# Altium PCB AD9760.PcbDoc
Units mil, origin at the board's own origin, x right, y up, seen from the top; angles counter-clockwise.
Board outline 2755.91 x 2165.35 mil, 2 copper layers (Top Layer, Bottom Layer); 73 components, 55 nets, 228 pads, 162 vias.
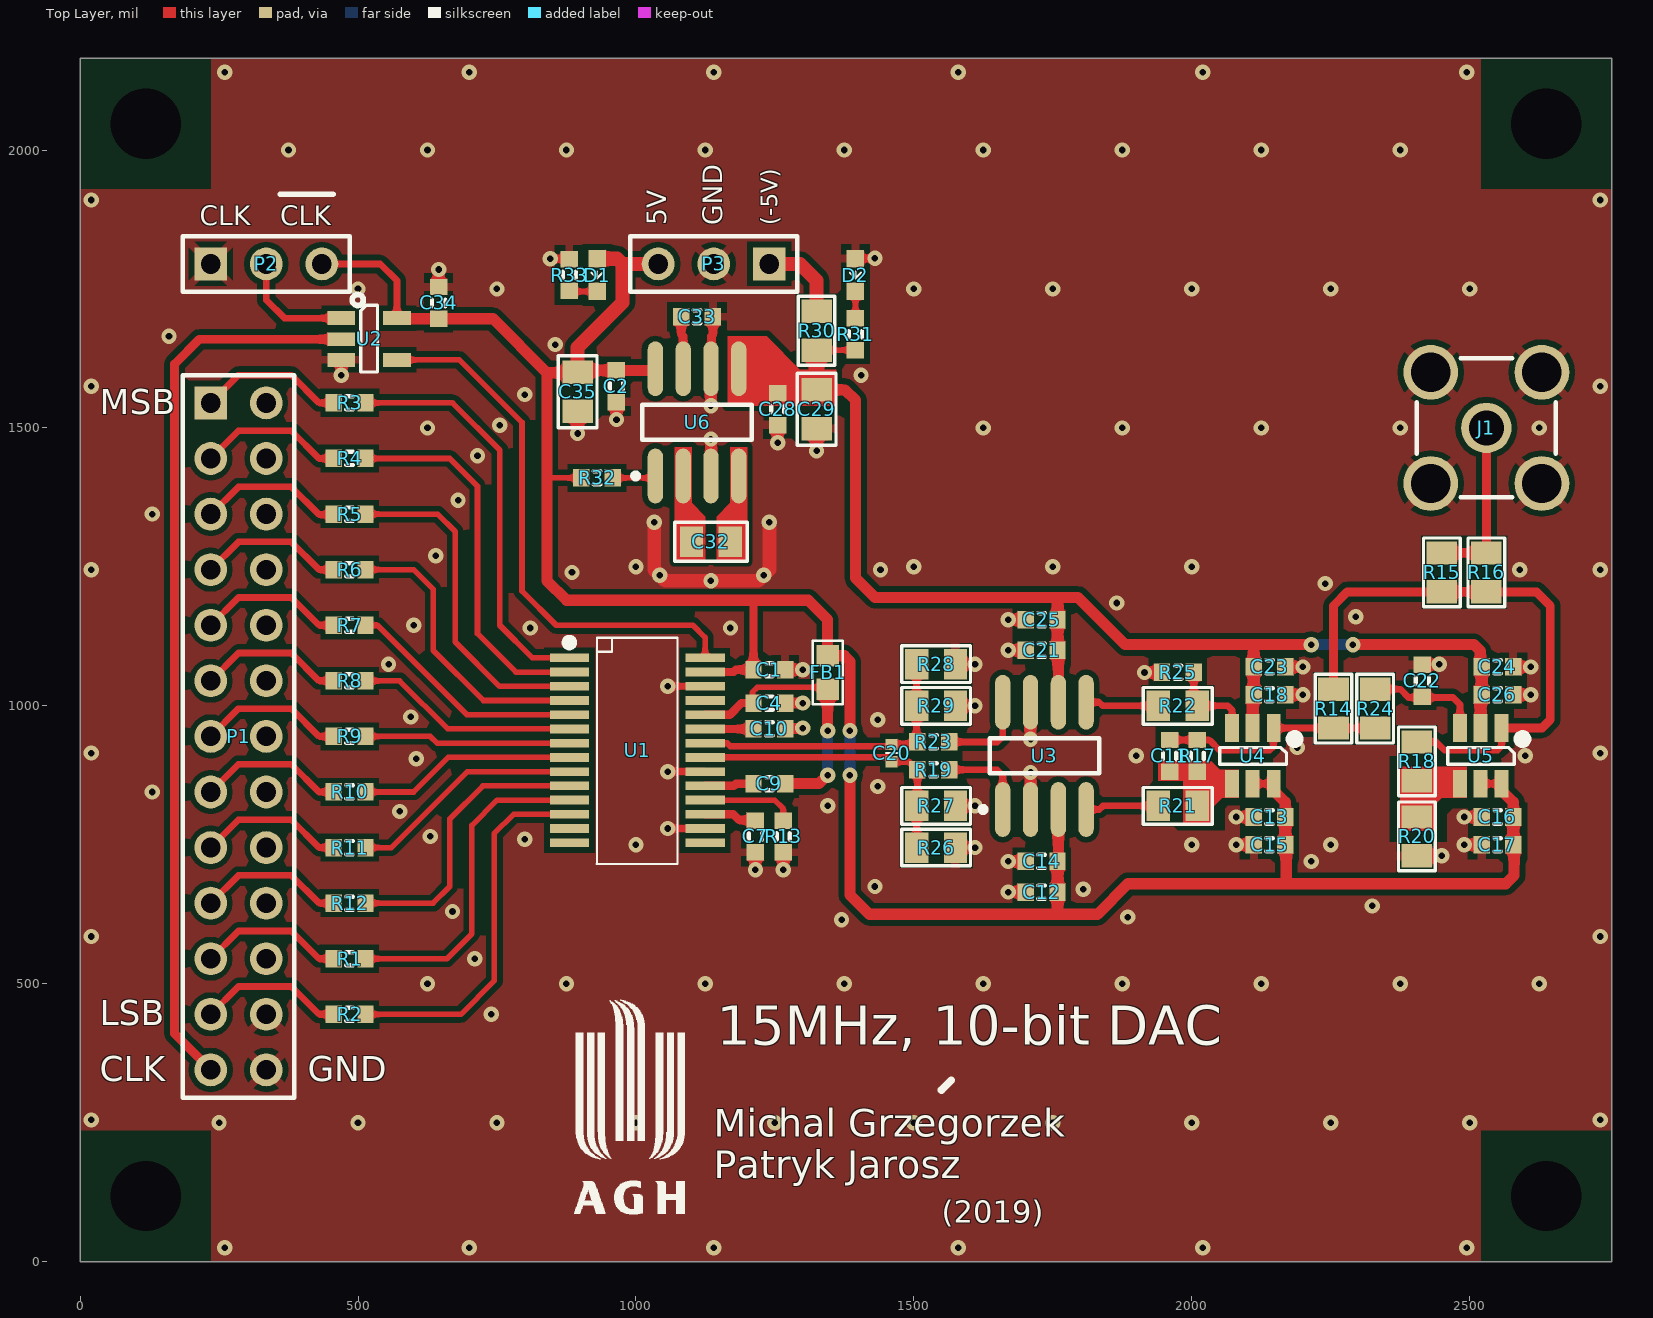
[diagram p0: Top Layer view]
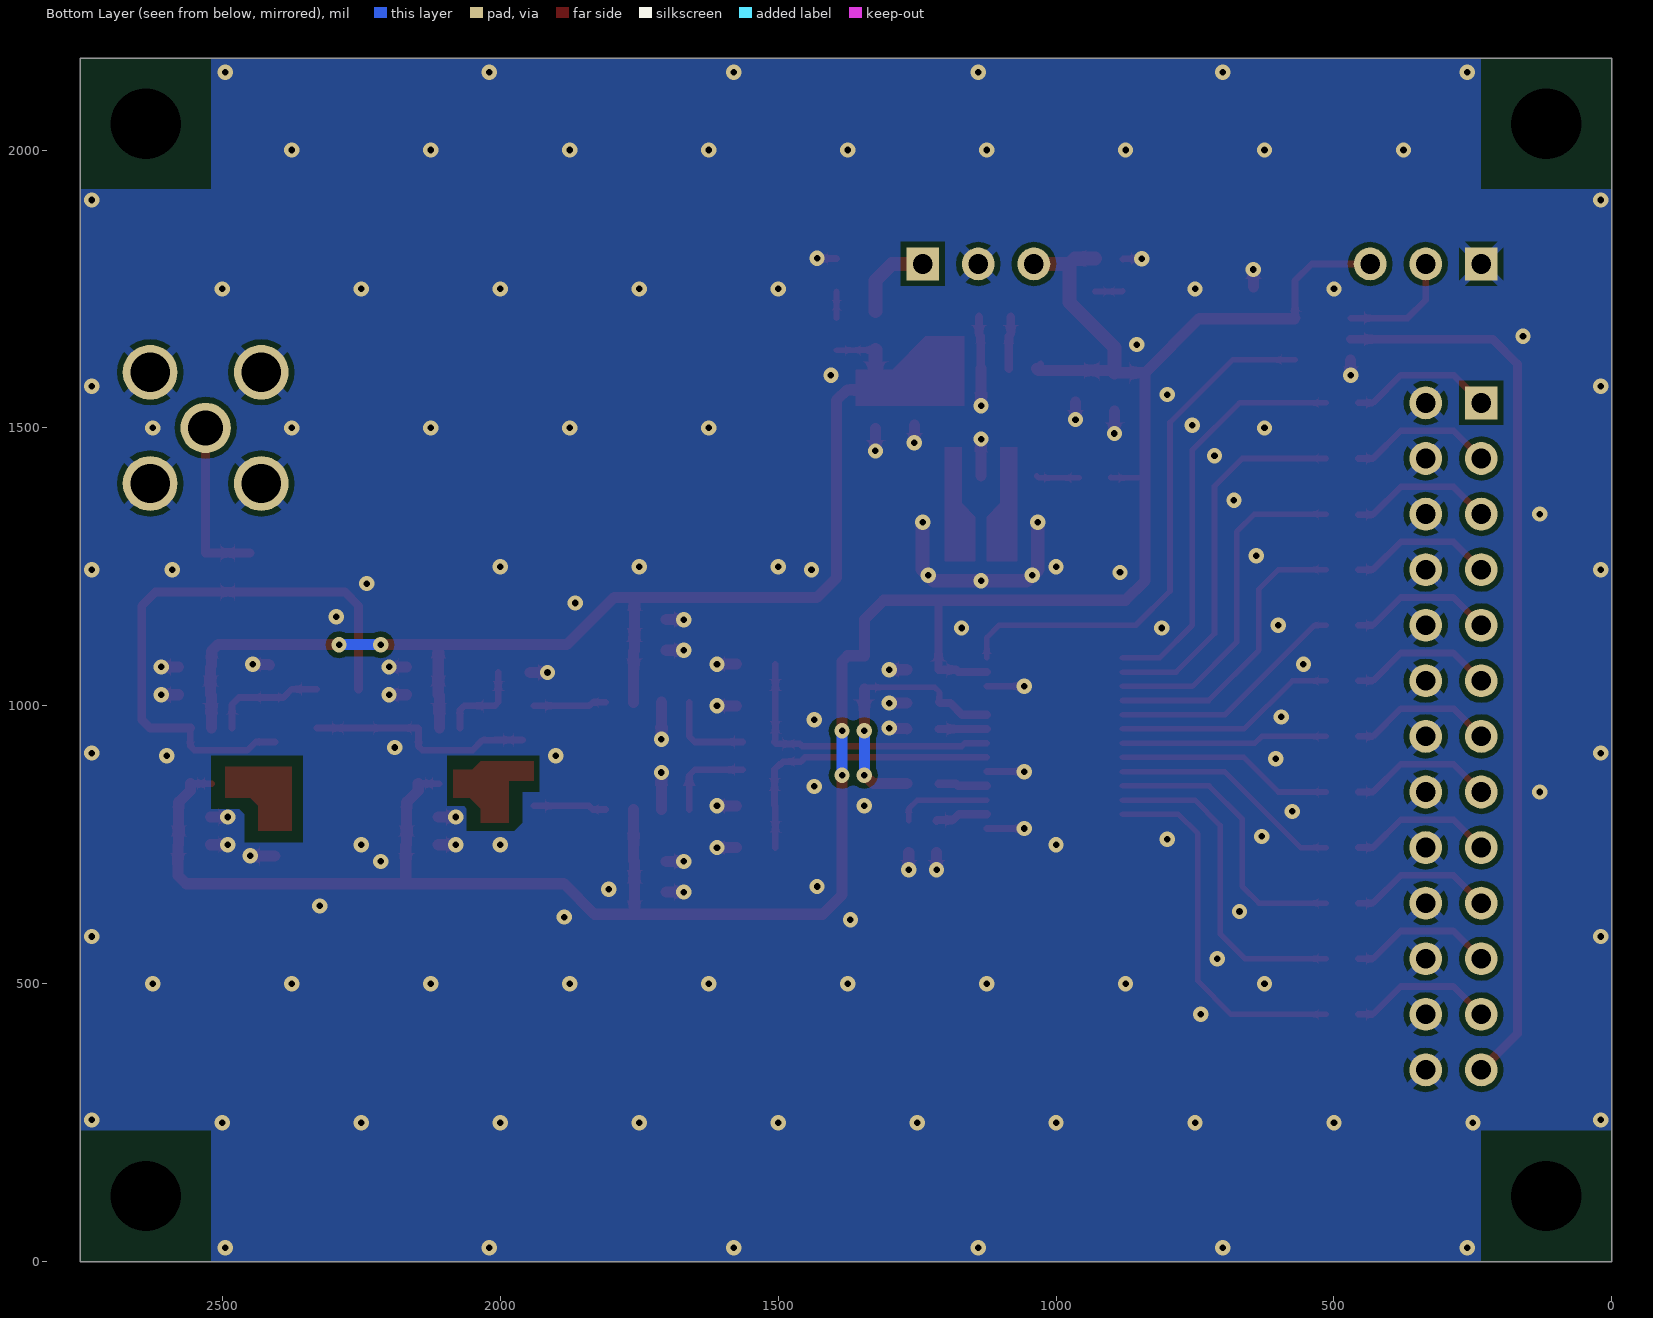
[diagram p1: Bottom Layer view, seen from below]
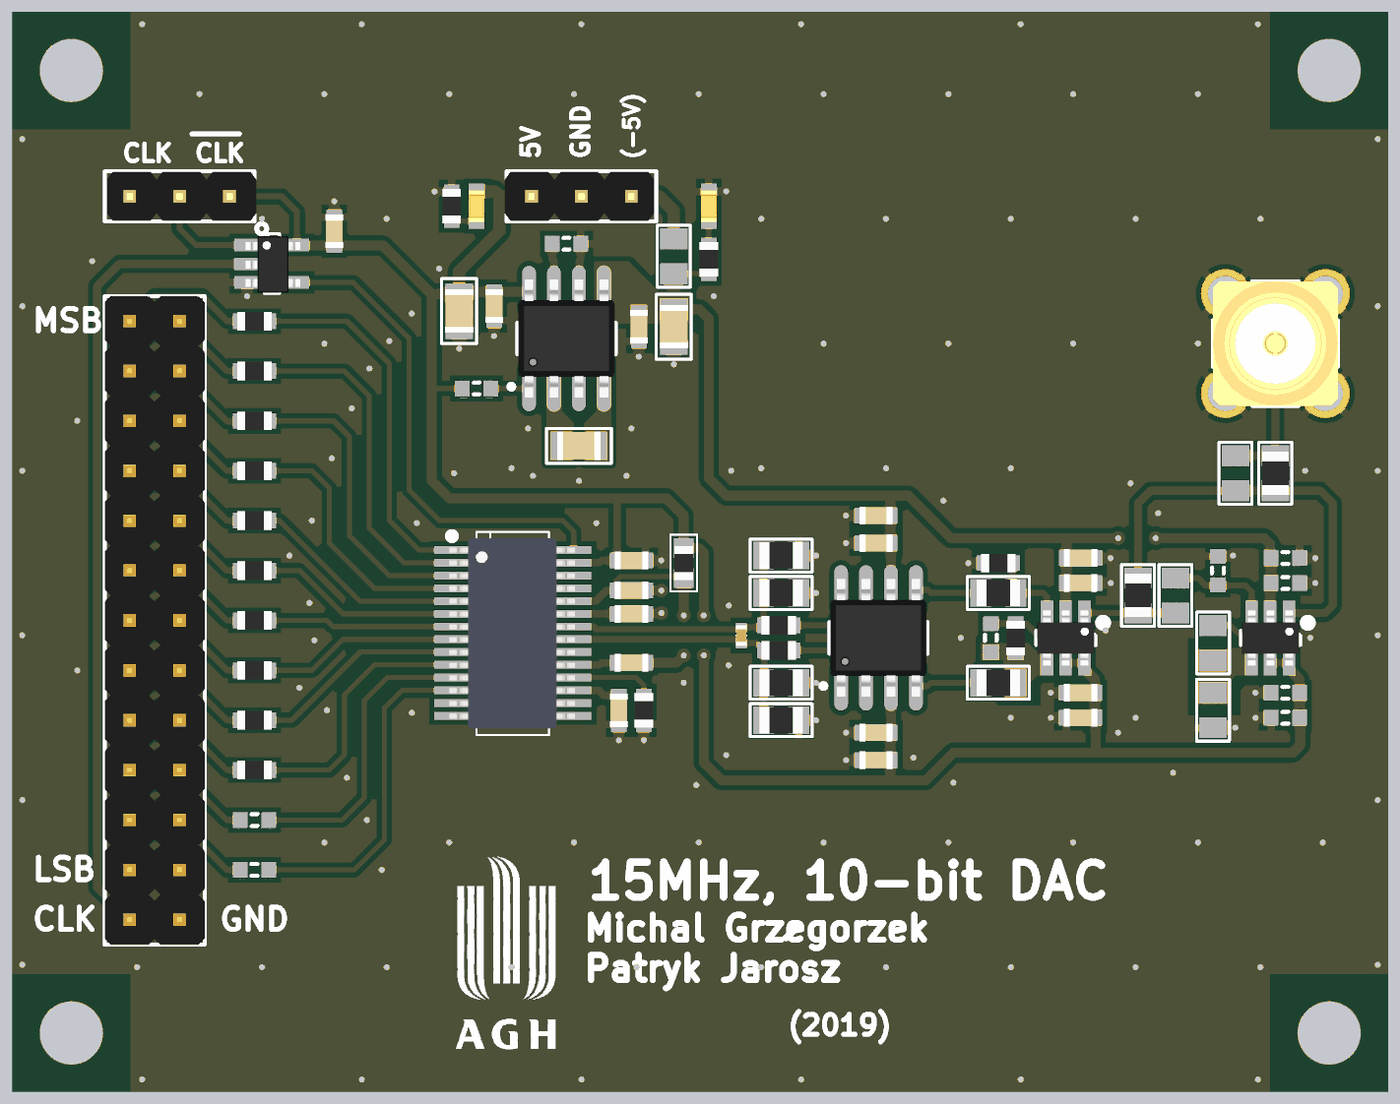
[diagram p2: 3D render of the assembled board from above, using the file's embedded part models]

## Layer stack, top to bottom
Top Solder: solder mask 0.4, Solder Resist, Dk 3.5
Top Layer: signal copper 1.4
Dielectric 1: dielectric 12.6, FR-4, Dk 4.8
Bottom Layer: signal copper 1.4
Bottom Solder: solder mask 0.4, Solder Resist, Dk 3.5

## Board outline
0,0 0,2165.35 2755.91,2165.35 2755.91,0

## Design rules (kind name [scope] priority, off if disabled: settings)
Clearance [All] p1: gap=10 ignorepadtopadclearanceinfootprint=FALSE except(6: Arc-SMDPad Track-SMDPad SMDPad-SMDPad; 8: Arc-Arc Arc-Track Arc-THPad Arc-Via Track-Track Track-THPad Track-Via SMDPad-THPad SMDPad-Via THPad-THPad THPad-Via Via-Via)
DiffPairsRouting [All] p1: maxlimit=10 minlimit=6 mostfreqgap=6 toplayer_minwidth=7 toplayer_maxwidth=15 toplayer_prefwidth=7 bottomlayer_minwidth=7 bottomlayer_maxwidth=15 bottomlayer_prefwidth=7 maxuncoupledlength=500
FabricationTestPointUsage TestPointUsage [All] p1: valid=0 allowmultiple=FALSE
FabricationTestpoint Testpoint [All] p1: side=3 testpointundercomponent=TRUE minsize=40 maxsize=100 preferedsize=60 minholesize=20 maxholesize=40 preferedholesize=32 testpointgrid=1 allowsidetop=TRUE allowsidebottom=TRUE usegrid=TRUE gridtolerance=0.01
Height [All] p1: minheight=0 maxheight=3937.01 prefheight=500
HoleSize [All] p1: absolutevalues=TRUE maxlimit=393.7 minlimit=11.81 maxpercent=80.000 minpercent=20.000
MinimumAnnularRing [All] p1: minimumring=6
MinimumSolderMaskSliver [All] p1: minsoldermaskwidth=6
PlaneConnect [All] p1: planeconnectstyle=Direct reliefexpansion=20 reliefentries=4 reliefconductorwidth=10 reliefairgap=10
PolygonConnect [All] p1: thpad.connectstyle=Relief thpad.reliefconductorwidth=15 thpad.reliefentries=4 thpad.polygonreliefangle="45 Angle" thpad.airgapwidth=10 smdpad.connectstyle=Relief smdpad.reliefconductorwidth=15 smdpad.reliefentries=4 smdpad.polygonreliefangle="90 Angle" smdpad.airgapwidth=10 via.connectstyle=Direct via.reliefconductorwidth=15 via.reliefentries=4 via.polygonreliefangle="45 Angle" via.airgapwidth=10
RoomDefinition U_FrontEnd [InComponentClass('U_FrontEnd')] p1: confinementstyle=ConfineOut formatcopy=TRUE lockcomponents=FALSE outline 4075,515 4650,515 4650,965 4075,965
RoomDefinition U_Power [InComponentClass('U_Power')] p2: confinementstyle=ConfineOut formatcopy=TRUE lockcomponents=FALSE outline 4100,30 4700,30 4700,525 4100,525
RoomDefinition U_DAC [InComponentClass('U_DAC')] p3: confinementstyle=ConfineOut formatcopy=TRUE lockcomponents=FALSE outline 4705,1140 4135,1140 4135,1485 4705,1485
RoutingVias [All] p1: holewidth=15.75 width=27.56 viastyle="Through Hole" minholewidth=11.81 minwidth=23.62 maxholewidth=19.68 maxwidth=39.37
SilkToSilkClearance [All] p1: silktosilkclearance=0
SilkToSolderMaskClearance [IsPad] p1: minsilkscreentomaskgap=2 clearancetoexposedcopper=TRUE
SolderMaskExpansion [All] p1: expansion=1
UnRoutedNet [All] p1: checkbadconnections=TRUE
Width [All] p1: maxlimit=200 minlimit=8 preferedwidth=12 minimp=50.000000 maximp=50.000000 favimp=50.000000
20 further rules are at their usual default settings.

## Classes and differential pairs
component class U_Power: C2 C28 C29 C32 C33 C35 D1 D2 P3 R30 R31 R32 R33 U6
component class U_FrontEnd: C11 C12 C13 C14 C15 C16 C17 C18 C20 C21 C22 C23 C24 C25 C26 J1 R14 R15 R16 R17 R18 R19 R20 R21 R22 R23 R24 R25 R26 R27 R28 R29 U3 U4 U5
component class U_DAC: C1 C4 C7 C9 C10 C34 FB1 P1 P2 R1 R2 R3 R4 R5 R6 R7 R8 R9 R10 R11 R12 R13 U1 U2

## Components (designator, comment, footprint, x,y, rotation, side; value= is the part's Value field where it differs from the comment)
C1 "Ceramic X7R" C_0603_1608 1240,1065 r0 top value=100nF
C2 "Ceramic X7R" C_0603_1608 965,1575 r270 top value=100nF
C4 "Ceramic X7R" C_0603_1608 1240,1005 r0 top value=100nF
C7 "Ceramic X7R" C_0603_1608 1215,765 r270 top value=100nF
C9 "Ceramic X7R" C_0603_1608 1240,860 r0 top value=100nF
C10 "Ceramic X7R" C_0603_1608 1240,958.39 r0 top value=100nF
C11 "-" C_NC_0603_1608 1960,910 r90 top value=NC
C12 "Ceramic X7R" C_0603_1608 1730,665 r180 top value=100nF
C13 "Ceramic X7R" C_0603_1608 2140,800 r180 top value=100nF
C14 "Ceramic X7R" C_0603_1608 1730,720 r180 top value=100nF
C15 "Ceramic X7R" C_0603_1608 2140,750 r180 top value=100nF
C16 "-" C_NC_0603_1608 2550,800 r180 top value=NC
C17 "-" C_NC_0603_1608 2550,750 r180 top value=NC
C18 "Ceramic X7R" C_0603_1608 2140,1020 r0 top value=100nF
C20 "Ceramic C0G" C_0402_1005 1460,915 r90 top value=0.3pF
C21 "Ceramic X7R" C_0603_1608 1730,1100 r180 top value=100nF
C22 "-" C_NC_0603_1608 2415,1045 r90 top value=NC
C23 "Ceramic X7R" C_0603_1608 2140,1070 r0 top value=100nF
C24 "-" C_NC_0603_1608 2550,1070 r0 top value=NC
C25 "Ceramic X7R" C_0603_1608 1730,1155 r180 top value=100nF
C26 "-" C_NC_0603_1608 2550,1020 r0 top value=NC
C28 "Ceramic X7R" C_0603_1608 1255,1533.54 r270 top value=1uF
C29 "Ceramic X7R" C_0805_2012 1325,1533.54 r270 top value=10uF
C32 "Ceramic X7R" C_0805_2012 1135,1295 r0 top value=10uF
C33 "-" C_NC_0603_1608 1110,1700 r0 top value=NC
C34 "Ceramic X7R" C_0603_1608 645,1725 r90 top value=100nF
C35 "Ceramic X7R" C_0805_2012 895,1565 r270 top value=10uF
D1 "Green Led" OL_0603_1608 930,1775 r90 top value=LTST-C190TGKT
D2 "Green Led" OL_0603_1608 1395,1775 r90 top value=LTST-C190TGKT
FB1 "Ferrite bead" FB_0603_1608 1345,1060 r90 top value=BLM18EG221TN1D
J1 "SMA VERTICAL" J_SMA_VERTICAL 2530,1500 r0 top value=901-144-8RFX
P1 "Goldpin" P_HEADER_2x13_2.54 235,1545 r270 top value=DS1021-2*40SF11
P2 "Goldpin" P_HEADER_1x3_2.54 235,1795 r0 top value=DS1021-1*3SF1-1
P3 "Goldpin" P_HEADER_1x3_2.54 1240,1795 r180 top value=DS1021-1*3SF1-1
R1 "Resistor" R_NC_0603_1608 485,545 r0 top value=NC
R2 "Resistor" R_NC_0603_1608 485,445 r0 top value=NC
R3 "Resistor" R_0603_1608 485,1545 r0 top value=22R
R4 "Resistor" R_0603_1608 485,1445 r0 top value=22R
R5 "Resistor" R_0603_1608 485,1345 r0 top value=22R
R6 "Resistor" R_0603_1608 485,1245 r0 top value=22R
R7 "Resistor" R_0603_1608 485,1145 r0 top value=22R
R8 "Resistor" R_0603_1608 485,1045 r0 top value=22R
R9 "Resistor" R_0603_1608 485,945 r0 top value=22R
R10 "Resistor" R_0603_1608 485,845 r0 top value=22R
R11 "Resistor" R_0603_1608 485,745 r0 top value=22R
R12 "Resistor" R_0603_1608 485,645 r0 top value=22R
R13 "Resistor" R_0603_1608 1265,765 r270 top value=2k
R14 "Resistor" R_0805_2012 2255,995 r90 top value=0R
R15 "Resistor" R_NC_0805_2012 2450,1240 r90 top value=NC
R16 "Resistor" R_0805_2012 2530,1240 r90 top value=51R
R17 "Resistor" R_0603_1608 2010,910 r90 top value=1k
R18 "Resistor" R_NC_0805_2012 2405,900 r90 top value=NC
R19 "Resistor" R_0603_1608 1535,885 r0 top value=510R
R20 "Resistor" R_NC_0805_2012 2405,765 r90 top value=NC
R21 "Resistor" R_0805_2012 1975,820 r0 top value=150R
R22 "Resistor" R_0805_2012 1975,1000 r0 top value=150R
R23 "Resistor" R_0603_1608 1535,935 r0 top value=510R
R24 "Resistor" R_NC_0805_2012 2330,995 r90 top value=NC
R25 "Resistor" R_0603_1608 1975,1060 r0 top value=1k
R26 "Resistor" R_0805_2012 1540,745 r180 top value=51R
R27 "Resistor" R_0805_2012 1540,820 r180 top value=51R
R28 "Resistor" R_0805_2012 1540,1075 r180 top value=51R
R29 "Resistor" R_0805_2012 1540,1000 r180 top value=51R
R30 "Resistor" R_NC_0805_2012 1325,1675 r270 top value=NC
R31 "Resistor" R_0603_1608 1395,1668.54 r270 top value=1k
R32 "Resistor" R_NC_0603_1608 930,1410 r180 top value=NC
R33 "Resistor" R_0603_1608 880,1775 r270 top value=1k
U1 "10-Bit, 125MSPS D/A Converter" TSSOP28_EP_4X10X12 1002.5,920 r270 top value=AD9760ARUZ
U2 "2-input EXCLUSIVE-OR gate" SOT23-5_SC74A_SOT753_M 520,1660 r270 top value=74AHC1G86GV,125
U3 "LT6600IS8-15#PBF" SOP8_SO8_SOIC8_4X5X18 1735,910 r90 top
U4 "LTC6228IS6" SOT23-6_SC74A_SOT753 2110,910 r180 top value=LTC6228IS6#TRMPBF
U5 "LTC6228IS6" SOT23-6_SC74A_SOT753 2520,910 r180 top value=LTC6228IS6#TRMPBF
U6 "ADM660" SOP8_SO8_SOIC8_4X5X18 1110,1510 r90 top value=ADM660ARZ

## Footprints (in the part's own frame and the unit in brackets; to place one, negate y for a bottom-side part, rotate by r counter-clockwise, add the part's x,y. Pads: shape width x height; smd on the part's side, far side on the other; paste and mask are expansions set on the pad)
C_0402_1005 [mm]
  rect 0.52x0.56 smd: 1(-0.39,0) 2(0.39,0)
  silkscreen extent 0,-0.25 0,0.25, body extent -0.52,-0.27 0.53,0.28, height 0.55
C_0603_1608 [mm]
  rect 0.75x0.8 smd: 1(-0.725,0) 2(0.725,0)
  silkscreen extent -0.15,-0.3 0.15,0.3, body extent -0.85,-0.45 0.85,0.45, height 0.89
C_0805_2012 [mil]
  rect 42x55 smd: 1(-35,0) 2(35,0)
  silkscreen extent -65,-35 65,35, body extent -43,-29 43,29, height 53
C_NC_0603_1608 [mm]
  rect 0.75x0.8 smd: 1(-0.725,0) 2(0.725,0)
  silkscreen extent -0.15,-0.3 0.15,0.3, body extent -0.85,-0.45 0.85,0.45, height 0.89
FB_0603_1608 [mil]
  rect 39x40 smd: 1(-30,0) 2(30,0)
  silkscreen extent -57,-27 57,27, body extent -34,-19 34,19, height 21
J_SMA_VERTICAL [mm]
  round 2.3 hole 1.6: 1(0,0)
  round 2.5 hole 1.8: 2(-2.54,-2.54) 2(-2.54,2.54) 2(2.54,-2.54) 2(2.54,2.54)
  silkscreen extent -3.17,-3.18 3.18,3.17, body extent -3.17,-3.17 3.18,3.18, height 9.5
OL_0603_1608 [mm]
  rect 0.8x0.8 smd: 1(-0.75,0) 2(0.75,0)
  silkscreen extent -0.15,-0.25 0.15,0.25, body extent -0.8,-0.4 0.8,0.4, height 0.75
P_HEADER_1x3_2.54 [mm] "Connector; Header; 3 Position, Male"
  rect 1.5x1.5 hole 0.9: 1(0,0)
  round 1.5 hole 0.9: 2(2.54,0) 3(5.08,0)
  silkscreen extent -1.27,-1.27 6.35,1.27, body extent -1.17,-1.25 6.45,1.25, height 8.2
P_HEADER_2x13_2.54 [mm] "Connector; Header; 10 Position; Male"
  rect 1.5x1.5 hole 0.9: 1(0,0)
  round 1.5 hole 0.9: 2(0,2.54) 3(2.54,0) 4(2.54,2.54) 5(5.08,0) 6(5.08,2.54) 7(7.62,0) 8(7.62,2.54) 9(10.16,0) 10(10.16,2.54) 11(12.7,0) 12(12.7,2.54) 13(15.24,0) 14(15.24,2.54) 15(17.78,0) 16(17.78,2.54) 17(20.32,0) 18(20.32,2.54) 19(22.86,0) 20(22.86,2.54) 21(25.4,0) 22(25.4,2.54) 23(27.94,0) 24(27.94,2.54) 25(30.48,0) 26(30.48,2.54)
  silkscreen extent -1.27,-1.27 31.75,3.81, body extent -1.27,-1.27 31.75,3.81, height 8.55
R_0603_1608 [mm]
  rect 0.75x0.8 smd: 1(-0.725,0) 2(0.725,0)
  silkscreen extent -0.15,-0.3 0.15,0.3, body extent -0.87,-0.47 0.88,0.48, height 0.54
R_0805_2012 [mil]
  rect 42x55 smd: 1(-35,0) 2(35,0)
  silkscreen extent -62,-33 62,33, body extent -43,-27 43,27, height 27
R_NC_0603_1608 [mm]
  rect 0.75x0.8 smd: 1(-0.725,0) 2(0.725,0)
  silkscreen extent -0.15,-0.3 0.15,0.3, body extent -0.87,-0.47 0.88,0.48, height 0.54
R_NC_0805_2012 [mil]
  rect 42x55 smd: 1(-35,0) 2(35,0)
  silkscreen extent -62,-33 62,33, body extent -43,-27 43,27, height 27
SOP8_SO8_SOIC8_4X5X18 [mm]
  oval 2.5x0.7 smd: 1(-2.45,1.905) 2(-2.45,0.635) 3(-2.45,-0.635) 4(-2.45,-1.905) 5(2.45,-1.905) 6(2.45,-0.635) 7(2.45,0.635) 8(2.45,1.905)
  silkscreen extent -2.57,-2.5 0.8,2.93, body extent -3,-2.45 3,2.45, height 1.7
SOT23-5_SC74A_SOT753_M [mil]
  rect 25x50 smd: 1(-37.5,-50) 2(0.5,-50) 3(37.5,-50) 4(37.5,50) 5(-37.5,50)
  silkscreen extent -80,-30 60,15, body extent -56,-53 59,57, height 57
SOT23-6_SC74A_SOT753 [mil]
  rect 25x50 smd: 1(-37.5,-50) 2(0.5,-50) 3(37.5,-50) 4(37.5,50) 5(0.5,50) 6(-37.5,50)
  silkscreen extent -81,-36 60,15, body extent -57,-55 57,55, height 39
TSSOP28_EP_4X10X12 [mm]
  rect 0.4x1.8 smd: 1(-4.225,-3.1) 2(-3.575,-3.1) 3(-2.925,-3.1) 4(-2.275,-3.1) 5(-1.625,-3.1) 6(-0.975,-3.1) 7(-0.325,-3.1) 8(0.325,-3.1) 9(0.975,-3.1) 10(1.625,-3.1) 11(2.275,-3.1) 12(2.925,-3.1) 13(3.575,-3.1) 14(4.225,-3.1) 15(4.225,3.1) 16(3.575,3.1) 17(2.925,3.1) 18(2.275,3.1) 19(1.625,3.1) 20(0.975,3.1) 21(0.325,3.1) 22(-0.325,3.1) 23(-0.975,3.1) 24(-1.625,3.1) 25(-2.275,3.1) 26(-2.925,3.1) 27(-3.575,3.1) 28(-4.225,3.1)
  silkscreen extent -5.14,-3.2 5.2,1.84, body extent -4.83,-3.23 4.87,3.17, height 1.02

## Part data
C1 C2 C4 C7 C9 C10 C12 C13 C14 C15 C18 C21 C23 C25 C34: library part C_100nF_50V_X7R_0603_5, "Capacitor", Dielectric=X7R, Manufacturer=Samsung, Manufacturer Part Number=CL10B104JB8NNNC, Tolerance (%)=5, Voltage=50V, HelpURL=http://www.tme.eu/pl/Document/4a42202b32dab16128fe107dd69598cc/samsung-chip-cap.pdf, Part Number=C_100nF_50V_X7R_0603_5, SCH_Footprint=0603, Supplier 1=TME, Supplier 2="RS Components", Supplier 3=Farnell, Supplier 4=Mouser, Supplier 5=Digi-Key, Supplier Part Number 1=CL10B104JB8NNNC
C11 C16 C17 C22 C24 C26 C33: library part C_GENERIC_0603, "Capacitor", Tolerance (%)=0, Voltage=0V, Dielectric=-, HelpURL=http://-, Manufacturer=-, Manufacturer Part Number=-, Part Number=C_GENERIC_0603, SCH_Footprint=0603, Supplier 1=TME, Supplier 2="RS Components", Supplier 3=Farnell, Supplier 4=Mouser, Supplier 5=Digi-Key
C20: library part C_0.3pF_50V_C0G_0402_33, "Capacitor", Dielectric=C0G, Manufacturer=Kemet, Manufacturer Part Number=CBR04C308B5GAC, Tolerance (%)=33, Voltage=50V, HelpURL=http://www.farnell.com/datasheets/2202355.pdf, Part Number=C_0.3pF_50V_C0G_0402_33, SCH_Footprint=0402, Supplier 1=TME, Supplier 2="RS Components", Supplier 3=Farnell, Supplier 4=Mouser, Supplier 5=Digi-Key, Supplier Part Number 2=7697024, Supplier Part Number 3=1973007, Supplier Part Number 4=80-CBR04C308B5G, Supplier Part Number 5=399-6155-1-ND
C28: library part C_1uF_25V_X7R_0603_10, "Capacitor", Dielectric=X7R, Manufacturer=Samsung, Manufacturer Part Number=CL10B105KA8NNNC, Tolerance (%)=10, Voltage=25V, HelpURL=http://www.tme.eu/pl/Document/4a42202b32dab16128fe107dd69598cc/samsung-chip-cap.pdf, Part Number=C_1uF_25V_X7R_0603_10, SCH_Footprint=0603, Supplier 1=TME, Supplier 2="RS Components", Supplier 3=Farnell, Supplier 4=Mouser, Supplier 5=Digi-Key, Supplier Part Number 1=CL10B105KA8NNNC
C29 C32 C35: library part C_10uF_10V_X7R_0805_10, "Capacitor", Dielectric=X7R, Manufacturer="Samsung Electro-Mechanics", Manufacturer Part Number=CL21B106KPQNNNG, Tolerance (%)=10, Voltage=10V, HelpURL=http://www.tme.eu/pl/Document/4a42202b32dab16128fe107dd69598cc/samsung-chip-cap.pdf, Part Number=C_10uF_10V_X7R_0805_10, SCH_Footprint=0805, Supplier 1=TME, Supplier 2="RS Components", Supplier 3=Farnell, Supplier 4=Mouser, Supplier 5=Digi-Key, Supplier Part Number 1=CL21B106KPQNNNG
D1 D2: library part OL_G_0603, "LED GREEN", Manufacturer=Lite-On, Manufacturer Part Number=LTST-C190TGKT, HelpURL=https://datasheet.octopart.com/LTST-C190TGKT-Lite-On-datasheet-158437.pdf, Part Number=OL_G_0603, SCH_Footprint=0603, Supplier 1=TME, Supplier 2="RS Components", Supplier 3=Farnell, Supplier 4=Mouser, Supplier 5=Digi-Key, Supplier Part Number 1=LTST-C190TGKT, Supplier Part Number 2=6920997P, Supplier Part Number 4=859-LTST-C190TGKT, Supplier Part Number 5=160-2019-1-ND
FB1: library part FB_BLM18EG221TN1D, "Ferrite Bead", Current=1A, Manufacturer=Murata, Manufacturer Part Number=BLM18EG221TN1D, Resistance=150mR, HelpURL=http://datasheet.octopart.com/BLM18EG221TN1D-Murata-datasheet-66919.pdf, Part Number=FB_BLM18EG221TN1D, SCH_Footprint=0603, Supplier 1=TME, Supplier 2="RS Components", Supplier 3=Farnell, Supplier 4=Mouser, Supplier 5=Digi-Key, Supplier Part Number 2=7926243P, Supplier Part Number 3=1515717, Supplier Part Number 4=81-BLM18EG221TN1D, Supplier Part Number 5=490-5979-1-ND
J1: library part J_SMA_VERTICAL, "SMA connector", Manufacturer="Amphenol RF", Manufacturer Part Number=901-144-8RFX, Component Type=Standard, HelpURL=http://www.mouser.com/ds/2/18/C901-144-8RFX-710432.pdf, Part Number=J_SMA_VERTICAL, SCH_Footprint="SMA VERTICAL", Supplier 1=TME, Supplier 2="RS Components", Supplier 3=Farnell, Supplier 4=Mouser, Supplier 5=Digi-Key, Supplier Part Number 3=1339820, Supplier Part Number 4=523-901-144-8RFX, Supplier Part Number 5=ARFX1231-ND
P1: library part P_HEADER_2x13_2.54, "Header, 26-Pin, Dual row", Manufacturer=Connfly, Manufacturer Part Number=DS1021-2*40SF11, Supplier Part Number 1=ZL202-80G, Component Type=Standard, HelpURL=http://www.tme.eu/pl/details/zl202-80g/listwy-i-gniazda-kolkowe/connfly/ds1021-2_40sf11/, Part Number=P_HEADER_2x13_2.54, SCH_Footprint="2x13 2.54mm", Supplier 1=TME, Supplier 2="RS Components", Supplier 3=Farnell, Supplier 4=Mouser, Supplier 5=Digi-Key
P2 P3: library part P_HEADER_1x3_2.54, "Header, 3-Pin", Manufacturer=Connfly, Manufacturer Part Number=DS1021-1*3SF1-1, Supplier Part Number 1=ZL201-03G, Component Type=Standard, HelpURL=http://www.tme.eu/en/Document/cc301e58a5da78cb543a94b5a5b7f06a/DS1021.pdf, Part Number=P_HEADER_1x3_2.54, SCH_Footprint="1x3 2.54mm", Supplier 1=TME, Supplier 2="RS Components", Supplier 3=Farnell, Supplier 4=Mouser, Supplier 5=Digi-Key
R1 R2 R32: library part R_GENERIC_0603, Part Number=R_GENERIC_0603, SCH_Footprint=0603, Supplier 1=TME, Supplier 2="RS Components", Supplier 3=Farnell, Supplier 4=Mouser, Supplier 5=Digi-Key
R3 R4 R5 R6 R7 R8 R9 R10 R11 R12: library part R_22R_0603_5, Manufacturer=Walsin, Manufacturer Part Number=WF06P220JTL, Power=125mW, Supplier Part Number 1=WF06P-22R-5%, Tolerance=5%, Voltage=50V, HelpURL=http://www.tme.eu/pl/Document/b315665a56acbc42df513c99b390ad98/ROYALOHM-THICKFILM.pdf, Part Number=R_22R_0603_5, SCH_Footprint=0603, Supplier 1=TME, Supplier 2="RS Components", Supplier 3=Farnell, Supplier 4=Mouser, Supplier 5=Digi-Key
R13: library part R_2k_0603_1, Manufacturer=Yageo, Manufacturer Part Number=RC0603FR-072KL, Power=100mW, Supplier Part Number 1=RC0603FR-072K, Tolerance=1%, Voltage=50V, HelpURL=http://datasheet.octopart.com/RC0603FR-072KL-Yageo-datasheet-8328172.pdf, Part Number=R_2k_0603_1, SCH_Footprint=0603, Supplier 1=TME, Supplier 2="RS Components", Supplier 3=Farnell, Supplier 4=Mouser, Supplier 5=Digi-Key, Supplier Part Number 4=603-RC0603FR-072KL, Supplier Part Number 5=311-2.00KHRCT-ND
R14: library part R_0R_0805_5, Manufacturer="Stackpole Electronics Inc.", Manufacturer Part Number=RMCF0805ZT0R00, Power=125mW, Tolerance=5%, Voltage=150V, HelpURL=https://www.seielect.com/Catalog/SEI-RMCF_RMCP.pdf, Part Number=R_0R_0805_5, SCH_Footprint=0805, Supplier 1=TME, Supplier 2="RS Components", Supplier 3=Farnell, Supplier 4=Mouser, Supplier 5=Digi-Key, Supplier Part Number 5=RMCF0805ZT0R00CT-ND
R15 R18 R20 R24 R30: library part R_GENERIC_0805, Part Number=R_GENERIC_0805, SCH_Footprint=0805, Supplier 1=TME, Supplier 2="RS Components", Supplier 3=Farnell, Supplier 4=Mouser, Supplier 5=Digi-Key
R16 R26 R27 R28 R29: library part R_51R_0805_1, Manufacturer=Royalohm, Manufacturer Part Number=0805S8F510JT5E, Power=125mW, Supplier Part Number 1=SMD0805-51R-1%, Tolerance=1%, Voltage=150V, HelpURL=https://www.tme.eu/pl/Document/b315665a56acbc42df513c99b390ad98/ROYALOHM-THICKFILM.pdf, Part Number=R_51R_0805_1, SCH_Footprint=0805, Supplier 1=TME, Supplier 2="RS Components", Supplier 3=Farnell, Supplier 4=Mouser, Supplier 5=Digi-Key
R17 R25 R31 R33: library part R_1k_0603_1, Manufacturer=Vishay, Manufacturer Part Number=CRCW06031K00FKEA, Power=100mW, Tolerance=1%, Voltage=75V, HelpURL=http://www.farnell.com/datasheets/2310790.pdf?_ga=2.256888843.1690599162.1548417389-1379097396.1542296996&_gac=1.262631934.1547230258.Cj0KCQiAmuHhBRD0ARIsAFWyPwhX8HcvXnM3tA0ZBodZLzDIjH2ZxLpjT5LWo9bad_HPRbU8LfPq44UaAhEwEALw_wcB, Part Number=R_1k_0603_1, SCH_Footprint=0603, Supplier 1=TME, Supplier 2="RS Components", Supplier 3=Farnell, Supplier 4=Mouser, Supplier 5=Digi-Key, Supplier Part Number 2=678-9875P, Supplier Part Number 3=1469740, Supplier Part Number 4=71-CRCW0603-1.0K-E3, Supplier Part Number 5=541-1.00KHCT-ND
R19 R23: library part R_510R_0603_1, Manufacturer=Vishay, Manufacturer Part Number=CRCW0603510RFKTABC, Power=100mW, Tolerance=1%, Voltage=75V, HelpURL=https://www.tme.eu/pl/Document/622e28308c06d160637f2b14751ba16b/Data%20Sheet%20CRCW_BCe3.pdf, Part Number=R_510R_0603_1, SCH_Footprint=0603, Supplier 1=TME, Supplier 2="RS Components", Supplier 3=Farnell, Supplier 4=Mouser, Supplier 5=Digi-Key, Supplier Part Number 1=CRCW0603510RFKTABC, Supplier Part Number 4=71-CRCW0603-510
R21 R22: library part R_150R_0805_1, Manufacturer=Royalohm, Manufacturer Part Number=0805S8F1503T5E, Power=125mW, Supplier Part Number 1=SMD0805-150K-1%, Tolerance=1%, Voltage=150V, HelpURL=https://www.tme.eu/pl/Document/b315665a56acbc42df513c99b390ad98/ROYALOHM-THICKFILM.pdf, Part Number=R_150R_0805_1, SCH_Footprint=0805, Supplier 1=TME, Supplier 2="RS Components", Supplier 3=Farnell, Supplier 4=Mouser, Supplier 5=Digi-Key
U1: library part U_AD9760ARUZ, "10-Bit 125Msps DACs", Manufacturer="Analog Devices", Manufacturer Part Number=AD9760ARUZ, HelpURL=https://www.analog.com/media/en/technical-documentation/data-sheets/AD9760.pdf, Part Number=U_AD9760ARUZ, SCH_Footprint=TSSOP28, Supplier 1=TME, Supplier 2="RS Components", Supplier 3=Farnell, Supplier 4=Mouser, Supplier 5=Digi-Key, Supplier Part Number 3=2192248, Supplier Part Number 4=584-AD9760ARUZ, Supplier Part Number 5=AD9760ARUZ-ND
U2: library part U_74AHC1G86GV.125, Manufacturer=Nexperia, Manufacturer Part Number=74AHC1G86GV,125, Supplier Part Number 1=74AHC1G86GV.125, HelpURL=https://assets.nexperia.cn/documents/data-sheet/74AHC_AHCT1G86_Q100.pdf, Part Number=U_74AHC1G86GV.125, SCH_Footprint=SOT23-5, Supplier 1=TME, Supplier 2="RS Components", Supplier 3=Farnell, Supplier 4=Mouser, Supplier 5=Digi-Key, Supplier Part Number 2=146-0517, Supplier Part Number 3=2777697, Supplier Part Number 4=771-AHC1G86GV125, Supplier Part Number 5=1727-4201-2-ND
U3: library part U_LT6600IS8-15#PBF, Manufacturer="Analog Devices", HelpURL=https://www.analog.com/media/en/technical-documentation/data-sheets/660015fb.pdf, Manufacturer Part Number=LT6600IS8-15#PBF, Part Number=U_LT6600IS8-15#PBF, SCH_Footprint=SOIC8, Supplier 1=TME, Supplier 2="RS Components", Supplier 3=Farnell, Supplier 4=Mouser, Supplier 5=Digi-Key, Supplier Part Number 4=584-LT6600IS8-15#PBF, Supplier Part Number 5=LT6600IS8-15#PBF-ND
U4 U5: library part U_LTC6228IS6#TRPBF, Manufacturer="Analog Devices", Manufacturer Part Number=LTC6228IS6#TRMPBF, HelpURL=https://www.analog.com/media/en/technical-documentation/data-sheets/LTC6228-6229.pdf, Part Number=U_LTC6228IS6#TRPBF, SCH_Footprint=SOT23-6, Supplier 1=TME, Supplier 2="RS Components", Supplier 3=Farnell, Supplier 4=Mouser, Supplier 5=Digi-Key, Supplier Part Number 4=584-6228IS6#TRMPBF, Supplier Part Number 5=LTC6228IS6#TRMPBFCT-ND
U6: library part VS_ADM660ARZ, Frequency (kHz)=25, Manufacturer="Analog Devices", Manufacturer Part Number=ADM660ARZ, HelpURL=https://www.analog.com/media/en/technical-documentation/data-sheets/ADM660_8660.pdf, Imax (A)=0,1, Iswitch (A)=0, Part Number=VS_ADM660ARZ, SCH_Footprint=SOIC8, Supplier 1=TME, Supplier 2="RS Components", Supplier 3=Farnell, Supplier 4=Mouser, Supplier 5=Digi-Key, Supplier Part Number 3=1661070, Supplier Part Number 4=584-ADM660ARZ, Supplier Part Number 5=ADM660ARZ-ND, Topology=Other, Vin max (V)=7, Vin min (V)=1,5, Vout max (V)=-1,5, Vout min (V)=-7

## Free pads (board coordinates)
  round 60 hole 125.98: 0(118.11,118.11) 0(118.11,2047.24) 0(2637.8,118.11) 0(2637.8,2047.24)

## Via types
v1: diameter 27.56, hole 11.81, Top Layer to Bottom Layer, tented both sides, 162 vias

## Nets (pads, with @x,y where several pads share a name; then routed paths per layer and width w, separated by ;. In a path a pad name is that pad's centre, name@x,y a point inside that pad or via, vN(x,y) a via of type N, cw(c..) or ccw(c..) an arc to the next point about the centre after c; other vN are vias at no path point)
5V: C1.1 C2.1 C12.1 C13.1 C14.1 C15.1 C16.1 C17.1 C34.1 C35.1 D1.2 FB1.2 P2.3 P3.3 R32.2 U1.27 U2.5 U3.3 U4.5 U4.6 U5.5 U5.6 U6.8 | length 4656
  Top Layer w10: 840,1405 845,1410 R32.2 R32.2@901.46,1410.98
  Top Layer w12: P2.3 540,1795 570,1765 U2.5 ; U6.8@1027.81,1615 1035,1607.81 U6.8 ; U4.5 U4.6 ; U5.5 U5.6
  Top Layer w15: U1.27 1175.75,1060.75 1180,1065 C1.1 1211.46,1188.54 1210,1190
  Top Layer w20: U2.5 571.04,1696.46 C34.1 742.76,1696.46 840,1599.22 ; U6.8 1032.09,1603.54 C2.1 898.54,1603.54 C35.1 894.22,1599.22 840,1599.22 ; v1(1385,875) 1385,660 1420,625 1758.54,625 ; v1(1385,955) 1385,1080 1375,1090 FB1.2 1344.5,1090.5 1344.5,1155.5 1310,1190 1210,1190 875,1190 840,1225 840,1405 840,1599.22 ; U3.3 1760,721.46 C14.1 C12.1 1758.54,625 ; U4.6 2147.5,847.5 2168.54,826.46 C13.1 C15.1 2170,748.54 2170,680 ; U5.6 2557.5,847.5 2578.54,826.46 C16.1 C17.1 2580,748.54 2580,695 2565,680 2170,680 ; 1758.54,625 1830,625 1885,680 2170,680
  Top Layer w25: C35.1 895,1645 975.75,1725.75 975.75,1795 ; D1.2 966.22,1804.53 975.75,1795 ; P3.3@1035,1795 975.75,1795
  Bottom Layer w20: v1(1385,875) v1(1385,955)
5VA: C4.1 C9.2 FB1.1 U1.24 | length 490.7
  Top Layer w10: C4.1@1210,1006.46 1210,1025 1218.25,1033.25 1341.75,1033.25 FB1.1
  Top Layer w15: U1.24 1168.98,983.98 1190,1005 1208.54,1005 C4.1@1210,1006.46
  Top Layer w20: C9.2 1329.5,860 1344.5,875 v1(1345,875) ; v1(1345,955) FB1.1
  Bottom Layer w20: v1(1345,875) v1(1345,955)
-5V: C18.1 C21.1 C23.1 C24.1 C25.1 C26.1 C28.1 C29.1 R30.2 R31.2 U3.6 U4.2 U5.2 U6.5 | length 2198.5
  Top Layer w10: R30.2 R31.2
  Top Layer w20: C29.1 1376.46,1568.54 1395,1550 1395,1230 1430,1195 1760,1195 ; U3.6 1760,1098.54 C21.1 C25.1 1758.54,1193.54 1760,1195 ; U4.2 2109.5,1018.04 C18.1 C23.1 2111.46,1110 ; v1(2215,1110) 2111.46,1110 ; v1(2290,1110) 2507.54,1110 2519.26,1098.28 2519.26,1072.2 C24.1 C26.1 2519.5,1018.04 U5.2 ; 1760,1195 1795,1195 1880,1110 2111.46,1110
  Top Layer w25: C29.1 R30.2
  Bottom Layer w20: v1(2215,1110) v1(2290,1110)
C\L\K\: U1.28 U2.4 | length 975.8
  Top Layer w10: U2.4 682.5,1622.5 795,1510 795,1206.63 856.63,1145 1102.5,1145 1124.55,1122.95 U1.28
CLK: P1.25 U2.2 | length 1615.4
  Top Layer w16: P1.25 170,410 170,1615 214.5,1659.5 U2.2
D0: P1.23 R2.1 | length 262.9
  Top Layer w12: P1.23 285,495 380,495 430,445 R2.1
D1: P1.21 R1.1 | length 262.9
  Top Layer w12: P1.21 285,595 380,595 430,545 R1.1
D2: P1.19 R12.1 | length 262.9
  Top Layer w12: P1.19 285,695 380,695 430,645 R12.1
D3: P1.17 R11.1 | length 262.9
  Top Layer w12: P1.17 285,795 380,795 430,745 R11.1
D4: P1.15 R10.1 | length 262.9
  Top Layer w12: P1.15 285,895 380,895 430,845 R10.1
D5: P1.13 R9.1 | length 262.9
  Top Layer w12: P1.13 285,995 380,995 430,945 R9.1
D6: P1.11 R8.1 | length 262.9
  Top Layer w12: P1.11 285,1095 380,1095 430,1045 R8.1
D7: P1.9 R7.1 | length 262.9
  Top Layer w12: P1.9 285,1195 380,1195 430,1145 R7.1
D8: P1.7 R6.1 | length 262.9
  Top Layer w12: P1.7 285,1295 380,1295 430,1245 R6.1
D9: P1.5 R5.1 | length 262.9
  Top Layer w12: P1.5@235,1343.98 285,1393.98 380,1393.98 430,1343.98 R5.1@456.46,1343.98
D10: P1.3 R4.1 | length 262.9
  Top Layer w12: P1.3 285,1495 380,1495 430,1445 R4.1
D11: P1.1 R3.1 | length 262.9
  Top Layer w12: P1.1 285,1595 380,1595 430,1545 R3.1
GND: C1.2 C2.2 C4.2 C7.2 C10.2 C12.2 C13.2 C14.2 C15.2 C16.2 C17.2 C18.2 C21.2 C22.2 C23.2 C24.2 C25.2 C26.2 C28.2 C29.2 C33.2 C34.2 C35.2 D2.2 J1.2 P1.2 P1.4 P1.6 P1.8 P1.10 P1.12 P1.14 P1.16 P1.18 P1.20 P1.22 P1.24 P1.26 P2.1 P3.2 R13.2 R20.1 R25.1 R26.1 R27.1 R28.1 R29.1 R33.1 U1.16 U1.20 U1.26 U2.3 U3.2 U3.7 U6.3 U6.6 | length 2011
  Top Layer w12: v1@845,1805 v1(845.73,1804.27) 879.27,1804.27 R33.1 ; v1(1057.5,779.25) 1057.66,779.41 U1.16@1124.55,779.41 ; v1(1057.5,881.61) 1057.66,881.77 U1.20@1124.55,881.77 ; v1(1057.5,1035) 1057.66,1035.16 U1.26 ; D2.2 1395.24,1804.76 1429.76,1804.76 v1(1430,1805)
  Top Layer w15: U6.6 1135.69,1607.14 1135.69,1665 1138.54,1667.86 C33.2
  Top Layer w20: v1(470,1595) U2.3 ; C34.2 v1(645,1785) ; v1(895,1490) C35.2 ; v1(965,1515) C2.2 ; U6.3 v1(1135,1480) ; v1(1135,1540) U6.6 ; v1(1215,705) C7.2 ; v1(1255,1473.54) C28.2 ; v1(1265,705) R13.2 ; C10.2 1269.35,959.19 1299.19,959.19 v1(1300,960) ; C4.2 v1(1300,1005) ; C1.2 v1(1300,1065) ; v1(1325,1458.54) C29.2 ; R26.1 v1(1610,745) ; R27.1 v1(1610,820) ; R29.1 v1(1610,1000) ; R28.1 v1(1610,1075) ; v1(1670,665) C12.2 ; v1(1670,720) C14.2 ; v1(1670,1100) C21.2 ; v1(1670,1155) C25.2 ; U3.2 v1(1710,880) ; v1(1710,940) U3.7 ; v1(1915,1060) R25.1 ; v1(2080,750) C15.2 ; v1(2080,800) C13.2 ; C18.2 v1(2200,1020) ; C23.2 v1(2200,1070) ; R20.1 v1(2450,730) ; C22.2 2415.73,1074.27 2444.27,1074.27 v1(2445,1075) ; v1(2490,750) C17.2 ; v1(2490,800) C16.2 ; C26.2 v1(2610,1020) ; C24.2 v1(2610,1070)
  Top Layer w25: v1(1032.91,1330) 1032.91,1245 v1(1042.91,1235) 1052.91,1225 v1(1135,1225) 1220,1225 v1(1230,1235) 1240,1245 v1(1240,1330)
  other v1: 260,25 700,25 1140,25 1580,25 2020,25 2495,25 250,250 500,250 750,250 1000,250 1250,250 1500,250 1750,250 2000,250 2250,250 2500,250 20,255 2735,255 740,445 625,500 875,500 1125,500 1375,500 1625,500 1875,500 2125,500 2375,500 2625,500 710,545 20,585 2735,585 1370,615 1885,620 670,630 2325,640 1805,670 1430,675 2215,720 1000,750 2000,750 2250,750 800,760 630,765 575,810 1345,820 130,845 1435,855 605,905 1900,910 2600,910 20,915 2735,915 2190,925 1435,975 595,980 555,1075 810,1140 1170,1140 600,1145 2295,1160 1865,1185 2240,1220 885,1240 20,1245 1440,1245 2590,1245 2735,1245 1000,1250 1500,1250 1750,1250 2000,1250 640,1270 130,1345 680,1370 715,1450 625,1500 1625,1500 1875,1500 2125,1500 2375,1500 2625,1500 755,1505 800,1560 20,1575 2735,1575 1405,1595 855,1650 160,1665 500,1750 750,1750 1500,1750 1750,1750 2000,1750 2250,1750 2500,1750 20,1910 2735,1910 375,2000 625,2000 875,2000 1125,2000 1375,2000 1625,2000 1875,2000 2125,2000 2375,2000 260,2140 700,2140 1140,2140 1580,2140 2020,2140 2495,2140
NetC7_1: C7.1 U1.17 | length 95.1
  Top Layer w15: U1.17 1175.16,804.84 1185.54,794.46 1214.08,794.46 C7.1
NetC9_1: C9.1 U1.19 | length 88.6
  Top Layer w15: U1.19 1176.02,856.02 1180,860 C9.1
NetC10_1: C10.1 U1.23 | length 86.9
  Top Layer w15: U1.23 C10.1
NetC11_1: C11.1 R17.1 R21.2 U4.4
NetC11_2: C11.2 R14.1 R17.2 R24.1 U4.1 | length 438.3
  Top Layer w12: C11.2 R17.2 2010.26,938.28 2031.72,938.28 2050,920 2140,920 2147.03,927.03 2147.03,959.53 U4.1 R14.1@2280,960 ; R14.1 R24.1
NetC20_1: C20.1 R19.1 R26.2 R27.2 U1.21 | length 532.3
  Top Layer w12: U1.21 1451.65,907.2 1459.21,899.65 C20.1 1490.66,899.65 1495.56,894.75 1497.69,894.75 1506.46,885.98 R19.1 1506.46,821.46 R27.2 R26.2
NetC20_2: C20.2 R23.1 R28.2 R29.2 U1.22 | length 528
  Top Layer w12: U1.22 1164.43,932.8 1170,927.22 1456.87,927.22 C20.2 1461.18,931.53 1502.99,931.53 R23.1 1505,936.46 R29.2 R28.2
NetC22_1: C22.1 R24.2 U5.3 | length 206.4
  Top Layer w12: R24.2 2375,1030 2390,1015 2470,1015 2482.5,1002.5 U5.3
NetC32_1: C32.1 U6.2
NetC32_2: C32.2 U6.4
NetC33_1: C33.1 U6.7 | length 95
  Top Layer w15: C33.1 1081.46,1668.54 1085,1665 U6.7
NetD1_1: D1.1 R33.2 | length 50.4
  Top Layer w10: R33.2 880.98,1745.47 D1.1
NetD2_1: D2.1 R31.1 | length 48.4
  Top Layer w10: R31.1 D2.1
NetJ1_1: J1.1 R15.2 R16.2 | length 305
  Top Layer w16: R15.2 R16.2 J1.1
NetP2_2: P2.2 U2.1 | length 213.5
  Top Layer w12: P2.2 335,1730 367.5,1697.5 U2.1
NetP3_1: P3.1 R30.1 | length 152.4
  Top Layer w25: P3.1 1295,1795 1325,1765 R30.1
NetR1_2: R1.2 U1.11 | length 599.4
  Top Layer w10: R1.2 660,545 705,590 705,785 750.43,830.43 U1.11
NetR2_2: R2.2 U1.12 | length 671.2
  Top Layer w10: R2.2 685,445 745,505 745,770 779.84,804.84 U1.12
NetR3_2: R3.2 U1.1 | length 741.4
  Top Layer w10: R3.2 670,1545 755,1460 755,1145 813.66,1086.34 U1.1
NetR4_2: R4.2 U1.2 | length 681.3
  Top Layer w10: R4.2 665,1445 715,1395 715,1130 784.25,1060.75 U1.2
NetR5_2: R5.2 U1.3 | length 611.5
  Top Layer w10: R5.2 643.37,1345 675,1313.37 675,1115 754.84,1035.16 U1.3
NetR6_2: R6.2 U1.4 | length 528.9
  Top Layer w10: R6.2 600,1245 635,1210 635,1100 725.43,1009.57 U1.4
NetR7_2: R7.2 U1.5 | length 433.6
  Top Layer w10: R7.2 535,1145 696.02,983.98 U1.5
NetR8_2: R8.2 U1.6 | length 402.8
  Top Layer w10: R8.2 575,1045 661.61,958.39 U1.6
NetR9_2: R9.2 U1.7 | length 372
  Top Layer w10: R9.2 630,945 642.2,932.8 U1.7
NetR10_2: R10.2 U1.8 | length 392.7
  Top Layer w10: R10.2 600,845 662.2,907.2 U1.8
NetR11_2: R11.2 U1.9 | length 423.5
  Top Layer w10: R11.2 560,745 696.61,881.61 U1.9
NetR12_2: R12.2 U1.10 | length 525.5
  Top Layer w10: R12.2 635,645 665,675 665,796.46 724.57,856.02 U1.10
NetR13_1: R13.1 U1.18 | length 168.3
  Top Layer w10: U1.18 1249.57,830.43 1265,815 R13.1
NetR14_2: R14.2 R15.1 R16.1 R18.2 U5.1 | length 1053.7
  Top Layer w12: R18.2 2440,935 2455,920 2550,920 2557.5,927.5 U5.1
  Top Layer w16: R14.2 2255,1180 2280,1205 R15.1 R16.1 2620,1205 2645,1180 2645,975 2630,960 U5.1
NetR18_1: R18.1 R20.2 U5.4
NetR19_2: R19.2 U3.1 | length 162.1
  Top Layer w12: R19.2 1650,885 1660,875 U3.1
NetR21_1: R21.1 U3.4 | length 132.7
  Top Layer w12: U3.4 1833.54,813.54 1840,820 R21.1
NetR22_1: R22.1 U3.5 | length 132.7
  Top Layer w12: U3.5 1833.54,1006.46 1840,1000 R22.1
NetR22_2: R22.2 R25.2 U4.3 | length 160.8
  Top Layer w12: R25.2 2003.54,1006.46 R22.2 2065,1000 2072.5,992.5 U4.3
NetR23_2: R23.2 U3.8 | length 162.1
  Top Layer w12: R23.2 1650,935 1660,945 U3.8
NetR32_1: R32.1 U6.1 | length 77.9
  Top Layer w10: R32.1 1031.46,1410 U6.1
pads on no net: U1.13 U1.14 U1.15 U1.25

## Polygon pours and split planes (outlines as drawn)
GND on Bottom Layer "Top Layer-No Net" (solid, pour order 5): 0,0 0,2165.35 2755.91,2165.35 2755.91,0
GND on Top Layer "Top Layer-No Net1" (solid, pour order 6): 0,0 0,2165.35 2755.91,2165.35 2755.91,0

## Other copper
Top Layer:
  pour cut-out: 2519.69,236.22 2755.91,236.22 2755.91,0 2519.69,0
  pour cut-out: 2519.69,2165.35 2755.91,2165.35 2755.91,1929.13 2519.69,1929.13
  pour cut-out: 0,2165.35 236.22,2165.35 236.22,1929.13 0,1929.13
  pour cut-out: 0,236.22 236.22,236.22 236.22,0 0,0
  pour cut-out: 2355,910 2520,910 2520,815 2470,815 2460,805 2460,755 2355,755
  region net NetR18_1: 2375,890 2495,890 2495,835 2450,835 2435,820 2435,775 2375,775
  pour cut-out: 1930,910 2095,910 2095,820 2065,820 2060,815 2060,775 1975,775 1960,790 1960,845 1930,845
  region net NetC11_1: 1940,900 2035,900 2050,885 2085,885 2085,835 2055,835 2035,815 2035,790 1985,790 1985,865 1940,865
  region net NetC32_2: 1200,1465 1170,1465 1170,1365 1145,1340 1145,1260 1200,1260
  region net NetC32_1: 1070,1465 1100,1465 1100,1365 1125,1340 1125,1260 1070,1260
  region net -5V: 1165,1665 1235,1665 1295,1605 1360,1605 1360,1540 1165,1540
Bottom Layer:
  pour cut-out: 2519.69,236.22 2755.91,236.22 2755.91,0 2519.69,0
  pour cut-out: 2519.69,2165.35 2755.91,2165.35 2755.91,1929.13 2519.69,1929.13
  pour cut-out: 0,2165.35 236.22,2165.35 236.22,1929.13 0,1929.13
  pour cut-out: 0,236.22 236.22,236.22 236.22,0 0,0
  pour cut-out: 2355,910 2520,910 2520,815 2470,815 2460,805 2460,755 2355,755
  pour cut-out: 1930,910 2095,910 2095,820 2065,820 2060,815 2060,775 1975,775 1960,790 1960,845 1930,845

## Silkscreen, mask and mechanical layers (free items; w line width, h text height)
Top Overlay:
  drawing of 2418 lines, arcs and shapes, not listed
  text "CLK" at 215,1865 h35
  text "CLK" at 360,1865 h35
  text "5V" at 1055,1865 h35 r90
  text "GND" at 1155,1865 h35 r90
  text "(-5V)" at 1255,1865 h30 r90
  text "MSB" at 35,1525 h45
  text "LSB" at 35,425 h45
  text "15MHz, 10-bit DAC" at 1145,390 h70
  text "CLK" at 35,325 h45
  text "GND" at 410,325 h45
  text "Michal Grzegorzek / Patryk Jarosz" at 1140,150 h50
  text "(2019)" at 1550,70 h40
Mechanical 1:
  the board outline again, w7.87

## Text inside footprints (layer, text, board x,y; h text height)
C1: Mechanical 17 "d" at 1205,1060 h10; Mechanical 19 "-" at 1205,1060 h10
C2: Mechanical 17 "d" at 960,1610 h10 r270; Mechanical 19 "-" at 960,1610 h10 r270
C4: Mechanical 17 "d" at 1205,1000 h10; Mechanical 19 "-" at 1205,1000 h10
C7: Mechanical 17 "d" at 1210,800 h10 r270; Mechanical 19 "-" at 1210,800 h10 r270
C9: Mechanical 17 "d" at 1205,855 h10; Mechanical 19 "-" at 1205,855 h10
C10: Mechanical 17 "d" at 1205,953.39 h10; Mechanical 19 "-" at 1205,953.39 h10
C11: Mechanical 17 "d" at 1965,875 h10 r90
C12: Mechanical 17 "d" at 1765,670 h10 r180; Mechanical 19 "-" at 1765,670 h10 r180
C13: Mechanical 17 "d" at 2175,805 h10 r180; Mechanical 19 "-" at 2175,805 h10 r180
C14: Mechanical 17 "d" at 1765,725 h10 r180; Mechanical 19 "-" at 1765,725 h10 r180
C15: Mechanical 17 "d" at 2175,755 h10 r180; Mechanical 19 "-" at 2175,755 h10 r180
C16: Mechanical 17 "d" at 2585,805 h10 r180
C17: Mechanical 17 "d" at 2585,755 h10 r180
C18: Mechanical 17 "d" at 2105,1015 h10; Mechanical 19 "-" at 2105,1015 h10
C20: Mechanical 17 "d" at 1462,886 h5.12 r90; Mechanical 19 "-" at 1462,886 h5.12 r90
C21: Mechanical 17 "d" at 1765,1105 h10 r180; Mechanical 19 "-" at 1765,1105 h10 r180
C22: Mechanical 17 "d" at 2420,1010 h10 r90
C23: Mechanical 17 "d" at 2105,1065 h10; Mechanical 19 "-" at 2105,1065 h10
C24: Mechanical 17 "d" at 2515,1065 h10
C25: Mechanical 17 "d" at 1765,1160 h10 r180; Mechanical 19 "-" at 1765,1160 h10 r180
C26: Mechanical 17 "d" at 2515,1015 h10
C28: Mechanical 17 "d" at 1250,1568.54 h10 r270; Mechanical 19 "-" at 1250,1568.54 h10 r270
C29: Mechanical 17 "d" at 1320,1578.54 h15 r270; Mechanical 19 "-" at 1320,1578.54 h15 r270
C32: Mechanical 17 "d" at 1090,1290 h15; Mechanical 19 "-" at 1090,1290 h15
C33: Mechanical 17 "d" at 1075,1695 h10
C34: Mechanical 17 "d" at 650,1690 h10 r90; Mechanical 19 "-" at 650,1690 h10 r90
C35: Mechanical 17 "d" at 890,1610 h15 r270; Mechanical 19 "-" at 890,1610 h15 r270
D1: Mechanical 17 "d" at 935,1740 h10 r90; Mechanical 19 "-" at 935,1740 h10 r90
D2: Mechanical 17 "d" at 1400,1740 h10 r90; Mechanical 19 "-" at 1400,1740 h10 r90
FB1: Mechanical 17 "d" at 1340,1030 h10 r90; Mechanical 19 "-" at 1360,1030 h10 r90
J1: Mechanical 17 "d" at 2420,1490 h20; Mechanical 19 "-" at 2450,1490 h20
P1: Mechanical 17 "d" at 255,1305 h60 r270; Mechanical 19 "-" at 255,1205 h60 r270
P2: Mechanical 17 "d" at 190,1765 h60; Mechanical 19 "-" at 190,1765 h60
P3: Mechanical 17 "d" at 1285,1825 h60 r180; Mechanical 19 "-" at 1285,1825 h60 r180
R1: Mechanical 17 "d" at 455,550 h10; Mechanical 19 "-" at 455,530 h10
R2: Mechanical 17 "d" at 455,450 h10; Mechanical 19 "-" at 455,430 h10
R3: Mechanical 17 "d" at 455,1550 h10; Mechanical 19 "-" at 455,1530 h10
R4: Mechanical 17 "d" at 455,1450 h10; Mechanical 19 "-" at 455,1430 h10
R5: Mechanical 17 "d" at 455,1350 h10; Mechanical 19 "-" at 455,1330 h10
R6: Mechanical 17 "d" at 455,1250 h10; Mechanical 19 "-" at 455,1230 h10
R7: Mechanical 17 "d" at 455,1150 h10; Mechanical 19 "-" at 455,1130 h10
R8: Mechanical 17 "d" at 455,1050 h10; Mechanical 19 "-" at 455,1030 h10
R9: Mechanical 17 "d" at 455,950 h10; Mechanical 19 "-" at 455,930 h10
R10: Mechanical 17 "d" at 455,850 h10; Mechanical 19 "-" at 455,830 h10
R11: Mechanical 17 "d" at 455,750 h10; Mechanical 19 "-" at 455,730 h10
R12: Mechanical 17 "d" at 455,650 h10; Mechanical 19 "-" at 455,630 h10
R13: Mechanical 17 "d" at 1270,795 h10 r270; Mechanical 19 "-" at 1250,795 h10 r270
R14: Mechanical 17 "d" at 2275,950 h10 r90; Mechanical 19 "-" at 2275,950 h10 r90
R15: Mechanical 17 "d" at 2470,1195 h10 r90; Mechanical 19 "-" at 2470,1195 h10 r90
R16: Mechanical 17 "d" at 2550,1195 h10 r90; Mechanical 19 "-" at 2550,1195 h10 r90
R17: Mechanical 17 "d" at 2005,880 h10 r90; Mechanical 19 "-" at 2025,880 h10 r90
R18: Mechanical 17 "d" at 2425,855 h10 r90; Mechanical 19 "-" at 2425,855 h10 r90
R19: Mechanical 17 "d" at 1505,890 h10; Mechanical 19 "-" at 1505,870 h10
R20: Mechanical 17 "d" at 2425,720 h10 r90; Mechanical 19 "-" at 2425,720 h10 r90
R21: Mechanical 17 "d" at 1930,800 h10; Mechanical 19 "-" at 1930,800 h10
R22: Mechanical 17 "d" at 1930,980 h10; Mechanical 19 "-" at 1930,980 h10
R23: Mechanical 17 "d" at 1505,940 h10; Mechanical 19 "-" at 1505,920 h10
R24: Mechanical 17 "d" at 2350,950 h10 r90; Mechanical 19 "-" at 2350,950 h10 r90
R25: Mechanical 17 "d" at 1945,1065 h10; Mechanical 19 "-" at 1945,1045 h10
R26: Mechanical 17 "d" at 1585,765 h10 r180; Mechanical 19 "-" at 1585,765 h10 r180
R27: Mechanical 17 "d" at 1585,840 h10 r180; Mechanical 19 "-" at 1585,840 h10 r180
R28: Mechanical 17 "d" at 1585,1095 h10 r180; Mechanical 19 "-" at 1585,1095 h10 r180
R29: Mechanical 17 "d" at 1585,1020 h10 r180; Mechanical 19 "-" at 1585,1020 h10 r180
R30: Mechanical 17 "d" at 1305,1720 h10 r270; Mechanical 19 "-" at 1305,1720 h10 r270
R31: Mechanical 17 "d" at 1400,1698.54 h10 r270; Mechanical 19 "-" at 1380,1698.54 h10 r270
R32: Mechanical 17 "d" at 960,1405 h10 r180; Mechanical 19 "-" at 960,1425 h10 r180
R33: Mechanical 17 "d" at 885,1805 h10 r270; Mechanical 19 "-" at 865,1805 h10 r270
U1: Mechanical 17 "d" at 982.5,1110 h25 r270; Mechanical 19 "-" at 982.5,1110 h25 r270
U2: Mechanical 17 "d" at 515,1715 h10 r270; Mechanical 19 "-" at 515,1715 h10 r270
U3: Mechanical 17 "d" at 1750,770 h25 r90; Mechanical 19 "-" at 1745,860 h25 r90
U4: Mechanical 17 "d" at 2170,910 h20 r180; Mechanical 19 "-" at 2170,910 h20 r180
U5: Mechanical 17 "d" at 2580,910 h20 r180; Mechanical 19 "-" at 2580,910 h20 r180
U6: Mechanical 17 "d" at 1125,1370 h25 r90; Mechanical 19 "-" at 1120,1460 h25 r90